# Altium PCB нижняя плата версия 2.PcbDoc (part 2 of 2)
Units mm, origin at the board's own origin, x right, y up, seen from the top; angles counter-clockwise.
Board outline 57.07 x 52.6 mm, 4 copper layers (Top Layer, Layer 1, Layer 2, Bottom Layer), stack 0.603 mm thick; 111 components, 105 nets, 542 pads, 68 vias.
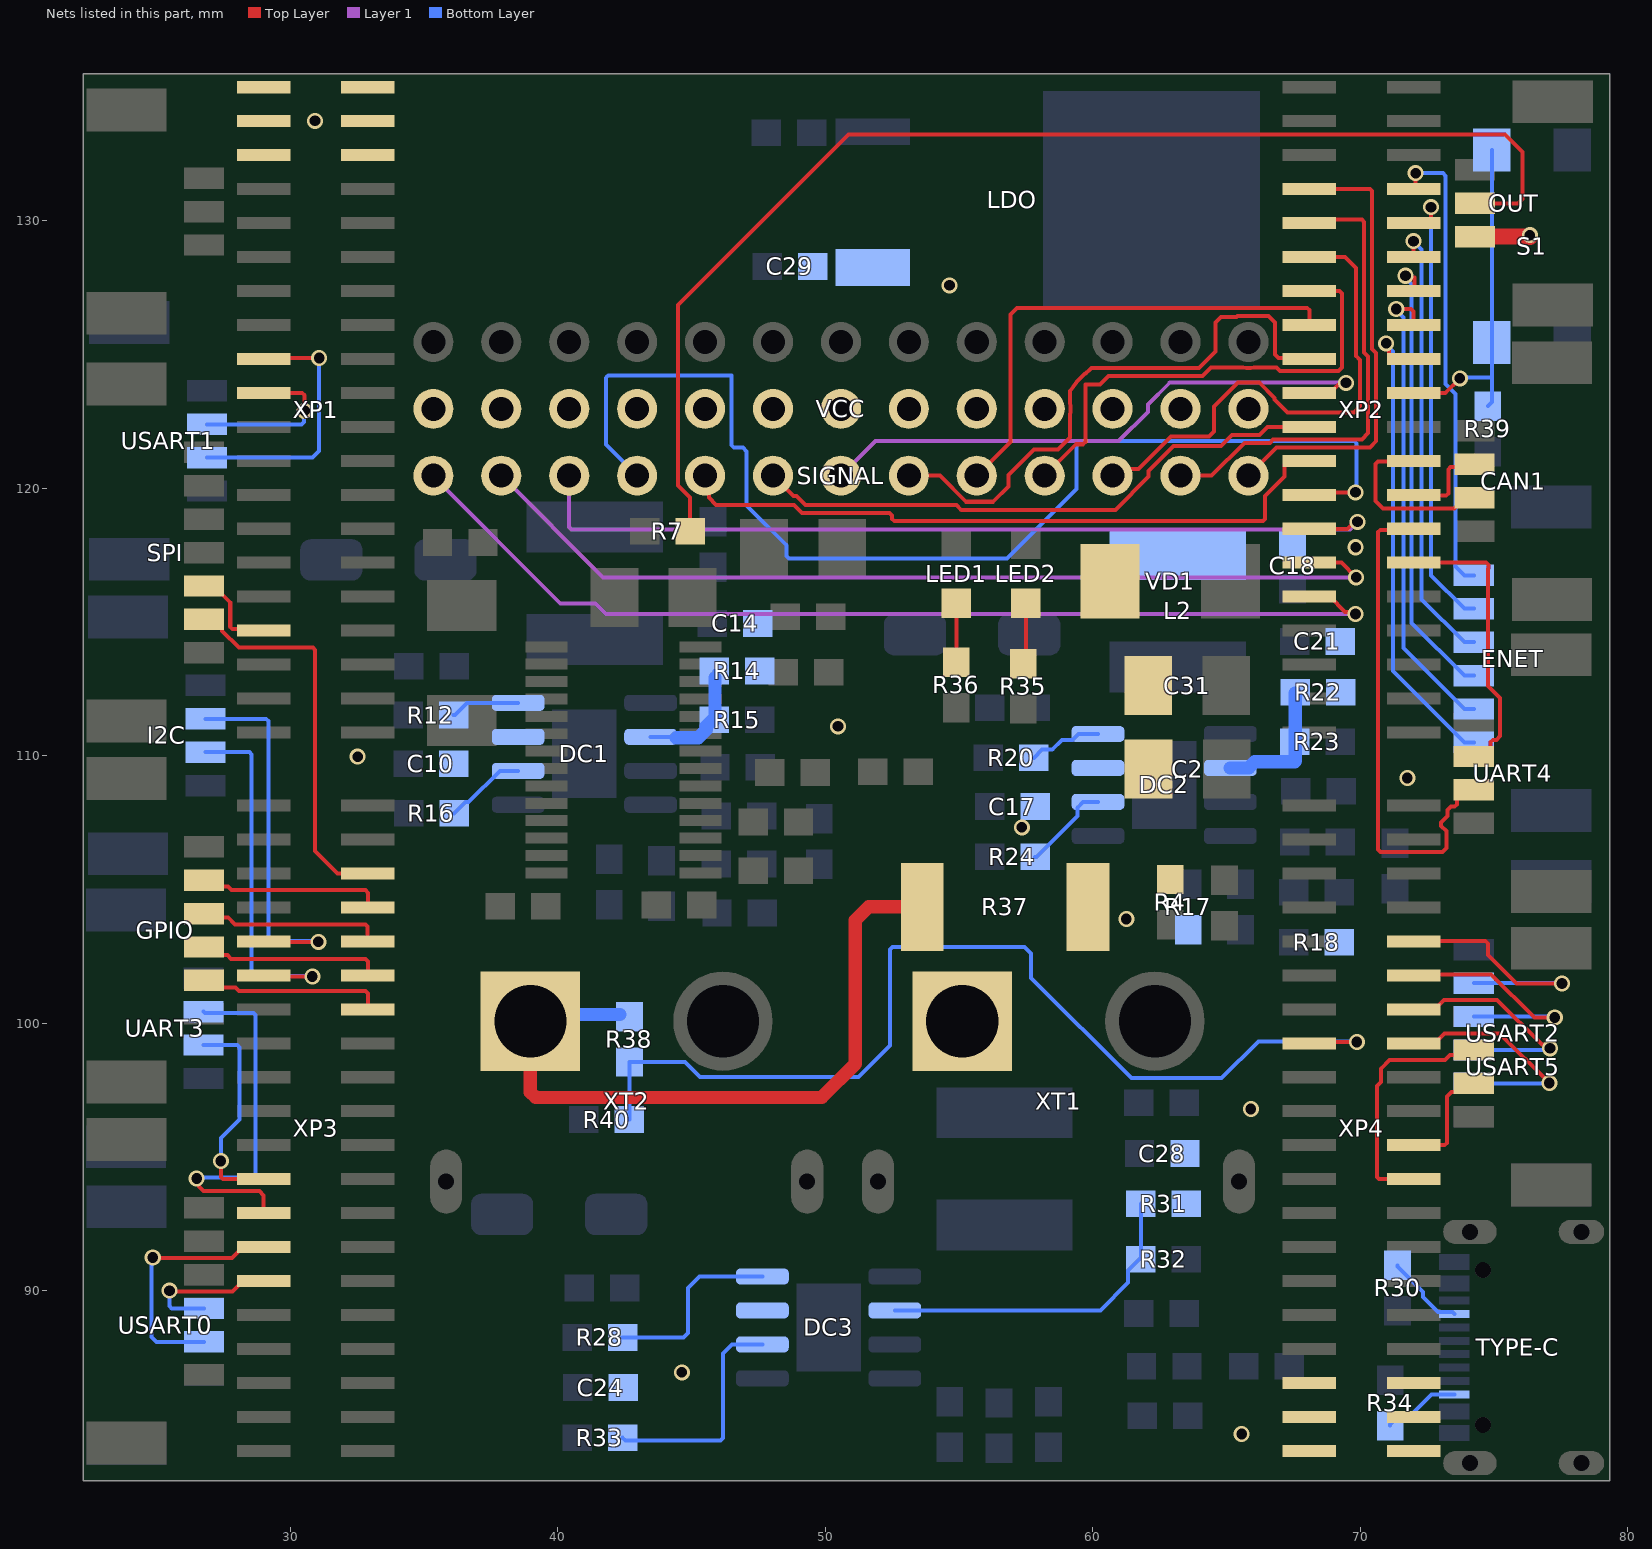
[diagram p4: the nets of this part, all layers, seen from the top]

## Via types
v1: diameter 0.6, hole 0.4, Top Layer to Bottom Layer, 67 vias
v2: diameter 0.6, hole 0.3, Top Layer to Bottom Layer, 1 vias

## Nets (pads, with @x,y where several pads share a name; then routed paths per layer and width w, separated by ;. In a path a pad name is that pad's centre, name@x,y a point inside that pad or via, vN(x,y) a via of type N, cw(c..) or ccw(c..) an arc to the next point about the centre after c; other vN are vias at no path point) (continued)
NetCAN1_2: CAN1.2 XP2.24 | length 6.8
  Top Layer w0.15: XP2.24@72,121.03 71.97,121 70.663,121 70.575,120.912 70.575,119.525 70.85,119.25 73.525,119.25 73.925,119.65 CAN1.2@74.275,119.65
NetCAN1_3: CAN1.3 XP2.26 | length 3.3
  Top Layer w0.15: XP2.26@72,119.76 72.035,119.725 73.212,119.725 73.3,119.813 73.3,120.712 73.388,120.8 74.175,120.8 CAN1.3@74.275,120.9
NetDC1_2: DC1.2 R14.1 R15.1 | length 5.4
  Bottom Layer w0.15: DC1.2@43.468,110.71 DC1.2@44.425,110.71 ; 45.16,110.71 45.8,111.35 R15.1@45.85,111.35 ; R14.1@45.85,112.925 R14.1@45.85,113.175
  Bottom Layer w0.5: DC1.2@44.425,110.675 45.257,110.675 45.55,110.968 45.55,111.1 45.8,111.35 R15.1@45.855,111.35 ; R15.1@45.875,111.436 45.875,112.219 R14.1@45.875,112.925
NetDC1_6: DC1.6 R16.1 | length 3.1
  Bottom Layer w0.15: R16.1@36.125,107.85 36.55,108.275 36.668,108.275 37.833,109.44 DC1.6@38.518,109.44
NetDC1_8: DC1.8 R12.2 | length 2.6
  Bottom Layer w0.15: R12.2@36.1,111.525 36.15,111.525 36.605,111.98 DC1.8@38.518,111.98
NetDC2_2: DC2.2 R22.1 R23.1 | length 8.1
  Bottom Layer w0.15: 67.55,109.775 R23.1@67.55,110.525 67.575,110.55 R22.1@67.575,112.375
  Bottom Layer w0.5: DC2.2@65.147,109.546 65.832,109.546 66.061,109.775 67.55,109.775 ; 67.575,109.811 67.575,111.3 ; R23.1@67.575,110.861 R22.1@67.575,112.35
NetDC2_6: DC2.6 R24.1 | length 3.4
  Bottom Layer w0.15: R24.1@57.85,106.225 57.9,106.225 59.426,107.751 59.426,108.058 59.644,108.276 DC2.6@60.197,108.276
NetDC2_8: DC2.8 R20.2 | length 2.8
  Bottom Layer w0.15: R20.2@57.8,109.925 58.11,110.235 58.487,110.235 58.85,110.598 59.247,110.598 59.465,110.816 DC2.8@60.197,110.816
NetDC3_2: DC3.2 R31.1 R32.1 | length 12.3
  Bottom Layer w0.15: DC3.2@52.6,89.26 60.285,89.26 61.325,90.3 61.325,90.75 61.75,91.175 R32.1@61.8,91.175 R31.1@61.8,93.25
NetDC3_6: DC3.6 R33.1 | length 8.6
  Bottom Layer w0.15: R33.1@42.425,84.5 42.525,84.4 46.087,84.4 46.175,84.488 46.175,87.65 46.515,87.99 DC3.6@47.65,87.99
NetDC3_8: DC3.8 R28.2 | length 7.2
  Bottom Layer w0.15: R28.2@42.425,88.25 44.7,88.25 44.875,88.425 44.875,90.1 45.305,90.53 DC3.8@47.65,90.53
NetENET_1: ENET.1 XP2.8 | length 17.4
  Top Layer w0.15: XP2.8@72,131.19 72.075,131.265 v1(72.075,131.785)
  Bottom Layer w0.15: v1(72.075,131.785) 73.102,131.785 73.2,131.687 73.2,123.898 73.575,123.523 73.575,117.075 73.9,116.75 ENET.1@74.25,116.75
NetENET_2: ENET.2 XP2.10 | length 17
  Top Layer w0.15: XP2.10@72,129.92 72.5,129.92 72.65,130.07 v1(72.65,130.515)
  Bottom Layer w0.15: v1(72.65,130.515) 72.65,116.75 73.9,115.5 ENET.2@74.25,115.5
NetENET_3: ENET.3 XP2.12 | length 16.7
  Top Layer w0.15: v1(71.995,129.245) 71.995,128.655 XP2.12@72,128.65
  Bottom Layer w0.15: v1(71.995,129.245) 71.995,129.237 72.3,128.932 72.3,115.85 73.9,114.25 ENET.3@74.25,114.25
NetENET_4: ENET.4 XP2.14 | length 17.1
  Top Layer w0.15: v1(71.7,127.95) 71.763,127.887 72.025,127.887 72.025,127.405 XP2.14@72,127.38
  Bottom Layer w0.15: v1(71.7,127.95) 71.7,127.862 71.925,127.637 71.925,114.975 73.9,113 ENET.4@74.25,113
NetENET_5: ENET.5 XP2.16 | length 17.6
  Top Layer w0.15: v1(71.35,126.705) 71.907,126.705 72,126.612 XP2.16@72,126.11
  Bottom Layer w0.15: v1(71.35,126.705) 71.35,126.667 71.625,126.392 71.625,114.025 73.9,111.75 ENET.5@74.25,111.75
NetENET_6: ENET.6 XP2.18 | length 18
  Top Layer w0.15: v1(70.975,125.425) 70.975,125.303 71.075,125.203 71.075,124.99 71.225,124.84 XP2.18@72,124.84
  Bottom Layer w0.15: v1(70.975,125.425) 70.975,125.362 71.225,125.112 71.225,113.175 73.9,110.5 ENET.6@74.25,110.5
NetGPIO_2: GPIO.2 XP3.8 | length 6.9
  Top Layer w0.15: GPIO.2@26.775,105.35 27.012,105.113 27.662,105.113 27.8,104.975 32.8,104.975 32.9,104.875 XP3.8@32.9,104.33
NetGPIO_3: GPIO.3 XP3.10 | length 6.9
  Top Layer w0.15: GPIO.3@26.775,104.1 26.912,103.963 27.662,103.963 27.925,103.7 32.802,103.7 32.89,103.612 XP3.10@32.89,103.06
NetGPIO_4: GPIO.4 XP3.12 | length 6.9
  Top Layer w0.15: GPIO.4@26.775,102.85 27.081,102.544 27.641,102.544 27.785,102.4 32.812,102.4 32.9,102.312 XP3.12@32.9,101.79
NetGPIO_5: GPIO.5 XP3.14 | length 6.9
  Top Layer w0.15: GPIO.5@26.775,101.6 27.035,101.34 27.942,101.34 28.082,101.2 32.812,101.2 32.9,101.112 XP3.14@32.9,100.52
NetI2C_2: I2C.2 XP3.11 | length 14
  Top Layer w0.15: XP3.11@29,101.79 29.044,101.746 v1(30.82,101.746)
  Bottom Layer w0.15: I2C.2@26.825,110.135 28.462,110.135 28.55,110.047 28.55,101.863 28.638,101.775 v1@30.725,101.775
NetI2C_3: I2C.3 XP3.9 | length 14.4
  Top Layer w0.15: XP3.9@29,103.06 29.014,103.046 v1(31.045,103.046)
  Bottom Layer w0.15: I2C.3@26.825,111.385 29.087,111.385 29.175,111.297 29.175,103.163 29.263,103.075 v1@30.95,103.075
NetLED1_1: LED1.1 R36.1 | length 2.2
  Top Layer w0.15: R36.1@54.9,113.5 LED1.1@54.9,115.7
NetLED2_1: LED2.1 R35.1 | length 2.3
  Top Layer w0.15: R35.1@57.4,113.45 57.5,113.55 LED2.1@57.5,115.7
NetOUT_2: OUT.2 R7.2 | length 46.7
  Top Layer w0.15: R7.2@44.95,118.4 44.95,119.651 44.5,120.101 44.5,126.85 50.875,133.225 75.425,133.225 76.075,132.575 76.075,130.825 75.91,130.66 OUT.2@74.3,130.66
NetR30_1: R30.1 TYPE-C.A5 | length 3
  Bottom Layer w0.15: R30.1@71.4,90.95 71.4,90.9 72.343,89.957 72.343,89.768 72.912,89.2 73.45,89.2 TYPE-C.A5@73.525,89.125
NetR34_1: R34.1 TYPE-C.B5 | length 2.9
  Bottom Layer w0.15: R34.1@71.125,84.95 71.125,85 71.55,85.425 71.978,85.425 72.678,86.125 TYPE-C.B5@73.525,86.125
NetR37_1: R37.1 R38.2 XT2.1 | length 24.2
  Top Layer w0.5: XT2.1@38.975,98.775 38.975,97.425 39.175,97.225 49.875,97.225 51.125,98.475 51.125,103.85 51.625,104.35 R37.1@53.625,104.35
  Bottom Layer w0.5: XT2.1@40.325,100.325 R38.2@42.325,100.325
NetR38_1: R38.1 R40.1 XP4.15 | length 38.6
  Top Layer w0.15: XP4.15@68.1,99.25 68.15,99.3 v1(69.875,99.3)
  Bottom Layer w0.15: R40.1@42.675,96.4 R38.1@42.675,98.55 44.754,98.55 45.312,97.992 51.242,97.992 52.425,99.175 52.425,102.762 52.513,102.85 57.45,102.85 57.7,102.6 57.7,101.7 61.45,97.95 64.825,97.95 66.2,99.325 69.85,99.325 v1(69.875,99.3)
NetR39_2: R39.2 S1.1 XP2.20 | length 12.9
  Top Layer w0.15: XP2.20@72,123.57 73.183,123.57 v1(73.727,124.114)
  Bottom Layer w0.15: v1@73.675,124.15 74.875,124.15 74.925,124.1 ; R39.2@74.775,123.075 74.925,123.225 74.925,124.1 ; S1.1@74.925,132.65 S1.1@74.925,125.45 74.925,124.1
NetSIGNAL_1: SIGNAL.1 XP2.31 | length 38.6
  Top Layer w0.15: XP2.31@68.1,115.95 68.875,115.95 69.439,115.386 69.739,115.386 v1(69.825,115.3)
  Layer 1 w0.15: SIGNAL.1@35.345,120.475 35.345,120.445 40.09,115.7 41.4,115.7 41.8,115.3 v1(69.825,115.3)
NetSIGNAL_2: SIGNAL.2 XP2.29 | length 35.5
  Top Layer w0.15: XP2.29@68.1,117.22 69.305,117.22 v1(69.85,116.675)
  Layer 1 w0.15: SIGNAL.2@37.885,120.475 41.685,116.675 v1(69.85,116.675)
NetSIGNAL_3: SIGNAL.3 XP2.27 | length 33.5
  Top Layer w0.15: XP2.27@68.1,118.49 69.518,118.49 69.778,118.75 v1(69.9,118.75)
  Layer 1 w0.15: SIGNAL.3@40.425,120.475 40.425,118.55 40.513,118.462 69.612,118.462 v1(69.9,118.75)
NetSIGNAL_4: SIGNAL.4 XP2.25 | length 44.5
  Top Layer w0.15: XP2.25@68.1,119.76 68.19,119.85 v1(69.825,119.85)
  Bottom Layer w0.15: SIGNAL.4@42.965,120.475 41.8,121.64 41.8,124.136 41.844,124.18 41.888,124.224 46.5,124.224 46.5,121.613 46.588,121.525 46.925,121.525 47.062,121.388 47.062,119.363 48.552,117.873 48.552,117.463 48.639,117.375 56.8,117.375 59.4,119.975 59.4,121.625 59.55,121.775 69.775,121.775 69.863,121.687 69.863,119.888 v1(69.825,119.85)
NetSIGNAL_5: SIGNAL.5 XP2.23 | length 25.5
  Top Layer w0.15: SIGNAL.5@45.505,120.475 45.65,120.33 45.65,119.65 45.92,119.38 48.827,119.38 49.127,119.08 52.407,119.08 52.5,118.987 52.5,118.863 52.588,118.775 66.362,118.775 66.45,118.863 66.45,119.721 67.175,120.446 67.175,120.88 67.325,121.03 XP2.23@68.1,121.03
NetSIGNAL_6: SIGNAL.6 XP2.21 | length 22
  Top Layer w0.15: SIGNAL.6@48.045,120.475 48.813,119.707 48.925,119.707 49.252,119.38 54.904,119.38 55.084,119.2 60.849,119.2 62.085,120.436 62.085,120.654 63.021,121.589 64.789,121.589 65.2,122 66.229,122 66.529,122.3 XP2.21@68.1,122.3
NetSIGNAL_7: SIGNAL.7 XP2.19 | length 22
  Top Layer w0.15: XP2.19@68.1,123.57 68.875,123.57 69.166,123.861 69.389,123.861 v1(69.475,123.947)
  Layer 1 w0.15: SIGNAL.7@50.585,120.475 51.877,121.767 60.967,121.767 62.061,122.861 62.061,123.13 62.881,123.95 69.471,123.95 v1(69.475,123.947)
NetSIGNAL_8: SIGNAL.8 XP2.17 | length 21.6
  Top Layer w0.15: SIGNAL.8@53.125,120.475 54.286,120.475 55.261,119.5 56.275,119.5 56.85,120.075 56.85,120.499 57.801,121.45 58.7,121.45 59.15,121.9 59.15,122.735 ccw(c58.205,122.975) 59.15,123.215 59.15,123.579 59.15,123.638 59.425,124.011 59.689,124.275 59.776,124.326 59.864,124.414 59.95,124.5 63.975,124.5 64.6,125.125 64.6,126.2 64.8,126.4 65.371,126.4 65.421,126.45 66.575,126.45 66.825,126.2 66.825,125 66.95,124.875 68.065,124.875 XP2.17@68.1,124.84
NetSIGNAL_9: SIGNAL.9 XP2.15 | length 18.4
  Top Layer w0.15: SIGNAL.9@55.665,120.475 56.925,121.735 56.925,126.5 57.175,126.75 68.012,126.75 68.1,126.662 XP2.15@68.1,126.11
NetSIGNAL_10: SIGNAL.10 XP2.13 | length 18.2
  Top Layer w0.15: SIGNAL.10@58.205,120.475 59.38,121.65 59.637,121.65 59.725,121.738 59.725,123.887 60.278,123.887 60.591,124.2 64.099,124.2 64.421,124.522 65.62,124.522 ccw(c65.825,125.475) 66.03,124.522 66.875,124.522 67.007,124.39 69.193,124.39 69.325,124.522 69.325,127.292 69.237,127.38 XP2.13@68.1,127.38
NetSIGNAL_11: SIGNAL.11 XP2.11 | length 19
  Top Layer w0.15: SIGNAL.11@60.745,120.475 61.003,120.733 61.708,120.733 62.921,121.947 64.347,121.947 64.529,122.129 64.529,123.057 65.396,123.925 65.4,123.925 65.425,123.95 66.229,123.95 66.8,123.379 66.8,123.327 67.287,122.84 69.762,122.84 70,123.077 70,124.809 69.85,124.959 69.85,128.237 69.437,128.65 XP2.11@68.1,128.65
NetSIGNAL_12: SIGNAL.12 XP2.9 | length 17.8
  Top Layer w0.15: SIGNAL.12@63.285,120.475 64.446,120.475 65.671,121.7 66.626,121.7 66.751,121.825 70.062,121.825 70.3,122.063 70.3,124.934 70.15,125.083 70.15,129.962 70.062,130.05 68.23,130.05 XP2.9@68.1,129.92
NetSIGNAL_13: SIGNAL.13 XP2.7 | length 17.1
  Top Layer w0.15: SIGNAL.13@65.825,120.475 66.875,121.525 70.362,121.525 70.6,121.763 70.6,125.058 70.45,125.208 70.45,131.112 70.362,131.2 68.11,131.2 XP2.7@68.1,131.19
NetSPI_5: SPI.5 XP1.33 | length 3.4
  Top Layer w0.15: SPI.5@26.775,116.35 27.125,116.35 27.75,115.725 27.75,114.826 27.838,114.738 28.942,114.738 XP1.33@29,114.68
NetSPI_6: SPI.6 XP3.6 | length 14.5
  Top Layer w0.15: SPI.6@26.775,115.1 27.125,115.1 27.45,114.775 27.45,114.675 28.075,114.05 30.837,114.05 30.925,113.962 30.925,106.438 31.763,105.6 XP3.6@32.9,105.6
NetUART3_2: UART3.2 XP3.23 | length 8.2
  Top Layer w0.15: v1(27.4,94.85) 27.4,94.258 27.488,94.17 XP3.23@29,94.17
  Bottom Layer w0.15: UART3.2@26.75,99.185 28.012,99.185 28.1,99.097 28.1,96.4 27.4,95.7 v1(27.4,94.85)
NetUART3_3: UART3.3 XP3.25 | length 13.9
  Top Layer w0.15: v1(26.495,94.196) 26.581,94.11 26.581,93.886 26.742,93.725 27.79,93.725 27.795,93.72 28.842,93.72 29,93.562 XP3.25@29,92.9
  Bottom Layer w0.15: v1@26.4,94.225 28.612,94.225 28.7,94.313 28.7,100.3 28.625,100.375 26.81,100.375 UART3.3@26.75,100.435
NetUART4_2: UART4.2 XP2.28 | length 18.9
  Top Layer w0.15: XP2.28@72,118.49 71.96,118.45 70.763,118.45 70.675,118.362 70.675,106.488 70.763,106.4 73.073,106.4 73.225,106.552 73.225,107.188 73.031,107.382 73.031,107.506 73.275,107.75 73.275,107.968 73.407,108.1 73.531,108.1 73.619,108.188 73.619,108.4 73.944,108.725 UART4.2@74.25,108.725
NetUART4_3: UART4.3 XP2.30 | length 10.9
  Top Layer w0.15: XP2.30@72,117.22 72.005,117.225 74.713,117.225 74.8,117.137 74.8,117.013 74.775,116.987 74.775,112.613 75.225,112.163 75.225,110.732 75.093,110.6 74.969,110.6 74.881,110.512 74.881,110.3 74.556,109.975 UART4.3@74.25,109.975
NetUSART0_2: USART0.2 XP3.27 | length 9.4
  Top Layer w0.15: v1(24.852,91.239) 24.865,91.225 27.618,91.225 27.82,91.225 28.225,91.63 XP3.27@29,91.63
  Bottom Layer w0.15: v1@24.8,91.275 24.8,88.275 24.925,88.15 24.99,88.085 USART0.2@26.775,88.085
NetUSART0_3: USART0.3 XP3.29 | length 5.6
  Top Layer w0.15: v1(25.475,90) 25.5,89.975 27.618,89.975 27.84,89.975 28.225,90.36 XP3.29@29,90.36
  Bottom Layer w0.15: v1(25.475,90) 25.475,89.423 25.563,89.335 USART0.3@26.775,89.335
NetUSART1_2: USART1.2 XP1.17 | length 9.8
  Top Layer w0.15: XP1.17@29,124.84 29.035,124.875 v1(31.075,124.875)
  Bottom Layer w0.15: USART1.2@26.875,121.15 30.825,121.15 31.075,121.4 v1@31.075,124.85
NetUSART1_3: USART1.3 XP1.19 | length 6.2
  Top Layer w0.15: XP1.19@29,123.57 30.437,123.57 30.525,123.482 v1(30.525,122.9)
  Bottom Layer w0.15: USART1.3@26.88,122.395 30.411,122.395 30.499,122.483 30.499,122.874 v1(30.525,122.9)
NetUSART2_2: USART2.2 XP4.10 | length 9.7
  Top Layer w0.15: XP4.10@72,103.06 72.015,103.075 74.687,103.075 74.775,102.987 74.775,102.557 75.843,101.489 v1(77.552,101.489)
  Bottom Layer w0.15: USART2.2@74.25,101.5 77.475,101.5 v1@77.5,101.525
NetUSART2_3: USART2.3 XP4.12 | length 8.9
  Top Layer w0.15: XP4.12@72,101.79 72.035,101.825 74.9,101.825 76.511,100.214 v1(77.277,100.214)
  Bottom Layer w0.15: USART2.3@74.25,100.25 v1@77.225,100.25
NetUSART2_4: USART2.4 XP4.14 | length 8.8
  Top Layer w0.15: XP4.14@72,100.52 72.775,100.52 73.13,100.875 75.118,100.875 76.794,99.199 76.845,99.199 76.98,99.064 v1(77.102,99.064)
  Bottom Layer w0.15: USART2.4@74.25,99 76.95,99 v1@77.05,99.1
NetUSART2_5: USART2.5 XP4.16 | length 8.8
  Top Layer w0.15: XP4.16@72,99.25 72.775,99.25 73.15,99.625 75.215,99.625 v1(77.077,97.764)
  Bottom Layer w0.15: USART2.5@74.25,97.75 76.975,97.75 v1@77.025,97.8
NetUSART5_2: USART5.2 XP4.22 | length 4.2
  Top Layer w0.15: XP4.22@72,95.44 73.162,95.44 73.25,95.528 73.25,97.262 73.413,97.425 73.925,97.425 USART5.2@74.25,97.75
NetUSART5_3: USART5.3 XP4.24 | length 9.3
  Top Layer w0.15: XP4.24@72,94.17 70.713,94.17 70.625,94.258 70.625,97.653 70.775,97.803 70.775,98.298 71.102,98.625 73.175,98.625 73.363,98.813 74.063,98.813 USART5.3@74.25,99
SERVO: C18.1 L2.2 R17.2 R18.2 VCC.1 VCC.2 VCC.3 VCC.4 VCC.5 VCC.6 VCC.7 VCC.8 VCC.9 VCC.10 VCC.11 VCC.12 VCC.13
  other v1: 61.26,103.898 69.835,117.798
VCC: C2.1 C10.2 C14.2 C17.2 C21.2 C24.2 C28.2 C29.2 C31.1 DC1.7 DC2.7 DC3.7 LDO.1 OUT.1 R4.2 R14.2 R22.2 R31.2 R37.2 VD1.2 XP1.1 XP1.2 XP1.3 XP1.4 XP1.5 XP1.6 XP4.35 XP4.36 XP4.37 XP4.38 XP4.39 XP4.40 XT1.1 | length 2.1
  Top Layer w0.6: OUT.1@74.3,129.41 76.34,129.41 v1@76.35,129.4
  other v1: 65.571,84.643 44.638,86.944 65.913,96.794 57.35,107.325 71.763,109.169 32.513,109.969 50.475,111.1 54.646,127.593 76.346,129.468 30.921,133.743
pads on no net: ADC.S AT.1 AT.2 AT.7 AT.13 AT.14 AT.15 AT.16 AT.27 AT.28 CAN1.S ENET.S GPIO.S I2C.S IN.S OUT.S SPI.S TYPE-C. TYPE-C.A6 TYPE-C.A7 TYPE-C.A8 TYPE-C.B6 TYPE-C.B7 TYPE-C.B8 TYPE-C.S1 TYPE-C.S2 TYPE-C.S3 TYPE-C.S4 UART3.S UART4.S USART0.S USART1.S USART2.S USART5.S XP1.15 XP1.16 XP1.18 XP1.20 XP1.21 XP1.22 XP1.23 XP1.24 XP1.26 XP1.28 XP1.30 XP1.32 XP1.34 XP1.35 XP1.36 XP2.22 XP2.32 XP2.33 XP2.34 XP2.35 XP2.36 XP3.5 XP3.7 XP3.13 XP3.15 XP3.16 XP3.17 XP3.18 XP3.19 XP3.20 XP3.21 XP3.22 XP3.31 XP3.33 XP3.34 XP4.5 XP4.6 XP4.7 XP4.8 XP4.9 XP4.11 XP4.13 XP4.18 XP4.19 XP4.20 XP4.21 XP4.23 XP4.25 XP4.26 XT1.S1 XT1.S2 XT2.S1 XT2.S2

## Polygon pours and split planes (outlines as drawn)
GND on Layer 2 "GND_L03_P052" (solid, remove dead copper, pour order 52): 22.25,135.5 22.25,82.925 79.275,82.925 79.3,82.9 79.3,135.475
SERVO on Layer 2 "SERVO_L03_P000" (solid, remove dead copper, pour order 0): 70.625,102.1 70.2,102.525 59.125,102.525 59.125,121.65 59.15,121.675 59.05,121.775 34.2,121.775 34.2,124.3 34.05,124.45 34.075,124.475 70.825,124.475 70.9,124.4
5V on Layer 2 "5V_L03_P004" (solid, remove dead copper, pour order 4): 38.55,119.65 34.375,119.65 34.375,102.725 34.3,102.65 34.425,102.525 45.65,102.525 45.65,119.689
4V2 on Layer 2 "4V2_L03_P049" (solid, remove dead copper, pour order 49): 27.375,128.15 29.8,128.15 32.525,128.15 32.525,91.175 32.625,91.075 32.825,91.275 57.675,91.275 57.675,83.175 57.75,83.1 27.565,83.1
4V2 on Layer 2 "4V2_L03_P033" (solid, remove dead copper, pour order 33): 61.375,92.725 61.4,92.7 66.925,92.7 66.925,90.25 66.95,90.225 61.25,90.225
4V2 on Layer 2 "4V2_L03_P024" (solid, remove dead copper, pour order 24): 53.35,97.7 51.15,97.7 51.15,83.075 62.85,83.075 62.85,97.675 62.951,97.776
GND on Bottom Layer "GND_L04_P047" (solid, remove dead copper, pour order 47): 22.275,135.45 22.25,135.425 22.25,82.975 79.175,82.975 79.275,83.075 79.275,135.425
NetC9_2 on Bottom Layer "NETC9_2_L04_P001" (solid, remove dead copper, pour order 1): 33.575,118.8 33.4,118.625 33.4,115.075 35.225,115.075 35.325,114.975 35.325,112.625 42.325,112.625 42.35,112.65 42.375,112.625 42.375,111.4 44.825,111.4 44.825,116.175 44.501,116.675 38.225,116.675 38.225,118.675 38.2,118.7
VCC on Bottom Layer "VCC_L04_P034" (solid, remove dead copper, pour order 34): 48.675,131.075 48.675,121.775 48.875,121.575 55.7,121.575 55.7,131.075 55.625,131.15
5V on Bottom Layer "5V_L04_P002" (solid, remove dead copper, pour order 2): 38.4,119.7 38.475,119.625 38.475,116.925 38.675,117.125 44.825,117.125 44.825,117.875 44.85,117.9 44.875,117.875 46.9,117.875 46.9,119.65 46.875,119.675
VCC on Bottom Layer "VCC_L04_P030" (solid, remove dead copper, pour order 30): 35.375,108.875 36.85,108.875 37.275,109.3 37.275,110.05 39.65,110.05 39.675,110.075 39.675,111.35 31.55,111.35 31.55,109.525 33.15,109.525 33.2,109.575 33.2,110.375
GND on Bottom Layer "GND_L04_P029" (solid, remove dead copper, pour order 29): 33.425,110.25 33.45,110.225 33.45,106.375 35.275,106.375 35.35,106.45 35.35,110.275
VCC on Bottom Layer "VCC_L04_P028" (solid, remove dead copper, pour order 28): 46.625,115.75 46.65,115.725 46.65,112.3 49.225,112.3 49.225,110.3 51.775,110.3 51.775,115.825
VCC on Bottom Layer "VCC_L04_P027" (solid, remove dead copper, pour order 27): 45.6,89.85 48.825,89.85 48.825,88.5 46.25,88.5 46.225,88.525 45.95,88.25 45.95,85.475 41.575,85.475 41.575,87.9 41.725,88.05 45.05,88.05 45.05,89.8 45.025,89.825
VCC on Bottom Layer "VCC_L04_P025" (solid, remove dead copper, pour order 25): 62.875,95.85 62.875,95.4 62.875,92.275 66.725,92.275 66.725,95.7 66.75,95.675 66.775,95.675 66.775,98 66.8,98.025 66.775,98.05 65.225,98.05 65.225,95.875 65.2,95.85
4V2 on Bottom Layer "4V2_L04_P023" (solid, remove dead copper, pour order 23): 51.725,85.85 51.775,85.8 51.775,83.05 60.125,83.05 60.15,83.025 60.225,83.1 60.225,84.925 60.25,84.95 60.175,85.025 53.975,85.025 53.975,85.825
4V2 on Bottom Layer "4V2_L04_P022" (solid, remove dead copper, pour order 22): 53.375,97.925 53.375,94.675 53.35,94.65 53.4,94.6 60.675,94.6 60.675,96.025 60.675,96.375 62.5,96.375 62.5,97.875 62.45,97.925
NetC23_2 on Bottom Layer "NETC23_2_L04_P021" (solid, remove dead copper, pour order 21): 51.475,89.975 60.525,89.975 60.575,90.025 60.575,94.25 40.475,94.25 40.425,94.2 40.425,91.25 41.725,91.25 41.7,91.225 41.7,89.175 44.325,89.175 44.35,89.2 44.35,91.15 50.45,91.15 50.475,91.125 50.475,90.3
VCC on Bottom Layer "VCC_L04_P018" (solid, remove dead copper, pour order 18): 68.425,115.2 68.475,115.15 68.475,111.5 70.675,111.5 70.7,111.475 70.7,108.35 72.675,108.35 72.825,108.5 72.825,111.05 72.7,111.05 70.45,113.3 70.45,115.225
VCC on Bottom Layer "VCC_L04_P017" (solid, remove dead copper, pour order 17): 56.975,109.125 57,109.1 57,106.95 58.1,106.95 59.075,107.925 59.075,108.875 61.375,108.875 61.325,108.925 61.325,110.25 58.825,110.25 58.775,110.2
SERVO on Bottom Layer "SERVO_L04_P015" (solid, remove dead copper, pour order 15): 60.575,104.375 64.5,104.375 64.5,102.575 64.725,102.35 64.75,102.375 68.425,102.375 68.425,103.8 68.475,103.85 70.6,103.85 70.6,101.225 70.525,101.3 60.575,101.3
SERVO on Bottom Layer "SERVO_L04_P013" (solid, remove dead copper, pour order 13): 59.1,116.25 59.3,116.05 66.575,116.05 66.575,117.075 66.675,117.175 70.35,117.175 70.35,119.075 70.275,119.15 59.125,119.15
NetC16_2 on Bottom Layer "NETC16_2_L04_P010" (solid, remove dead copper, pour order 10): 64.15,110.15 64.225,110.225 66.625,110.225 66.625,115.5 66.55,115.575 55.75,115.575 55.75,113.125 55.7,113.075 55.725,113.05 57.1,113.05 57.1,111.125 57.15,111.075 58.875,111.075 58.875,111.65 58.9,111.675 63.925,111.675 63.925,110.25 63.875,110.2
5V on Bottom Layer "5V_L04_P005" (solid, remove dead copper, pour order 5): 46.75,104.825 46.775,104.8 46.775,103.375 42.225,103.375 42.225,102.675 48.925,102.675 48.95,102.7 48.95,104.825
5V on Bottom Layer "5V_L04_P003" (solid, remove dead copper, pour order 3): 40.325,105.275 40.325,102.725 40.3,102.7 40.325,102.675 42.9,102.675 42.9,105.275
GND on Top Layer "GND_L01_P048" (solid, remove dead copper, pour order 48): 22.3,135.475 22.3,82.95 22.275,82.925 79.325,82.925 79.325,135.45 79.35,135.475
5V on Top Layer "5V_L01_P045" (solid, remove dead copper, pour order 45): 65.675,88.375 65.675,87.275 65.725,87.325 73.475,87.325 73.475,88.325 73.5,88.35
VCC on Top Layer "VCC_L01_P054" (solid, remove dead copper, pour order 54): 62.037,107.6 62.337,107.9 63.45,107.9 63.175,118.401
3V3 on Top Layer "3V3_L01_P044" (solid, remove dead copper, pour order 44): 65.65,89.4 65.675,89.375 65.675,88.6 73.775,88.6 73.925,88.45 74.025,88.55 74.025,89.45
VCC on Top Layer "VCC_L01_P016" (solid, remove dead copper, pour order 16): 53,97.825 59.075,97.825 59.125,97.875 59.125,102.35 61.725,102.35 61.925,102.55 61.925,104.4 62.025,104.5 64,104.5 64,106.345 62.187,106.312 62.187,107.75 63.2,118.675 63.55,118.8 63.425,118.675 58.725,118.675 58.725,109.3 58.525,109.1 53.125,109.1 53.05,109.175
VCC on Top Layer "VCC_L01_P041" (solid, remove dead copper, pour order 41): 64.35,87.05 64.35,83.275 73.6,83.275 73.6,87.025 73.525,87.1
VCC on Top Layer "VCC_L01_P039" (solid, remove dead copper, pour order 39): 27.675,135.425 27.8,135.3 27.8,132.175 34.375,132.175 34.4,132.15 34.4,135.35
5V on Top Layer "5V_L01_P038" (solid, remove dead copper, pour order 38): 25.7,132.625 25.75,132.575 25.75,130.9 27.7,130.9 27.875,130.725 27.925,130.775 34.4,130.775 34.4,131.825 34.425,131.85 34.35,131.925 27.875,131.925 27.25,132.55
4V2 on Top Layer "4V2_L01_P037" (solid, remove dead copper, pour order 37): 27.85,129.025 27.85,126.75 27.825,126.725 36.65,126.725 36.65,129.05 36.625,129.075
3V3 on Top Layer "3V3_L01_P036" (solid, remove dead copper, pour order 36): 27.775,130.525 27.825,130.475 27.825,129.4 36.6,129.4 36.625,129.425 36.625,130.6
4V2 on Top Layer "4V2_L01_P032" (solid, remove dead copper, pour order 32): 64.45,92.075 73.925,92.075 73.95,92.05 73.85,91.95 73.85,89.675 65.675,89.675 64.45,90.9
GND on Layer 1 "GND_L02_P053" (solid, remove dead copper, pour order 53): 22.225,135.475 22.225,82.925 22.275,82.875 79.325,82.875 79.325,135.45 79.3,135.475
VCC on Layer 1 "VCC_L02_P019" (solid, remove dead copper, pour order 19): 56.3,110 56.3,106 56.25,105.95 73.15,105.95 73.15,110.7 56.2,110.7
VCC on Layer 1 "VCC_L02_P026" (solid, remove dead copper, pour order 26): 66.8,106.975 67.025,106.75 67.025,92.3 48.8,92.3 48.8,84.05 42.025,84.05 41.9,84.175 41.975,84.25 41.975,92.475 46.3,92.475 46.675,92.85 46.675,97.75 55.625,97.75 55.65,97.725 56.3,98.375 56.3,106
VCC on Layer 1 "VCC_L02_P051" (solid, remove dead copper, pour order 51): 51.45,128.975 51.425,128.95 51.425,125.825 59.829,125.825 60.1,126.096 60.1,129.975
VCC on Layer 1 "VCC_L02_P031" (solid, remove dead copper, pour order 31): 31.575,109.175 31.5,109.1 53.175,109.1 53.175,103.425 53.475,103.725 58.525,103.725 58.525,112.775 57.6,113.7 31.575,113.7
VCC on Layer 1 "VCC_L02_P046" (solid, remove dead copper, pour order 46): 72.625,105.95 72.9,106.225 78.75,106.225 78.75,131.425 78.825,131.5 77.075,133.25 57.75,133.25 57.75,127.775 59.65,125.875 70.875,125.875 70.875,110.725
VCC on Layer 1 "VCC_L02_P043" (solid, remove dead copper, pour order 43): 57.35,129.9 57.525,130.075 76.75,130.075 76.75,128.4 57.325,128.4
VCC on Layer 1 "VCC_L02_P042" (solid, remove dead copper, pour order 42): 43.875,87.45 43.825,87.4 43.825,83.075 67,83.075 67.025,83.05 67.1,83.125 67.1,86.975 61.525,86.975 61.275,87.225 61.65,87.6 61.65,93.325 47.9,93.325 47.325,92.75
VCC on Layer 1 "VCC_L02_P040" (solid, remove dead copper, pour order 40): 29.175,134.975 29.175,132.2 29.1,132.125 51.35,132.125 51.45,132.025 51.45,128.975 57.85,128.975 57.9,128.925 57.9,134.9